# Altium PCB Electrode_Array_Hex.PcbDoc
Units mm, origin at the board's own origin, x right, y up, seen from the top; angles counter-clockwise.
Board outline 45 x 55 mm, 2 copper layers (Top Layer, Bottom Layer); 2 components, 38 nets, 95 pads, 48 vias.
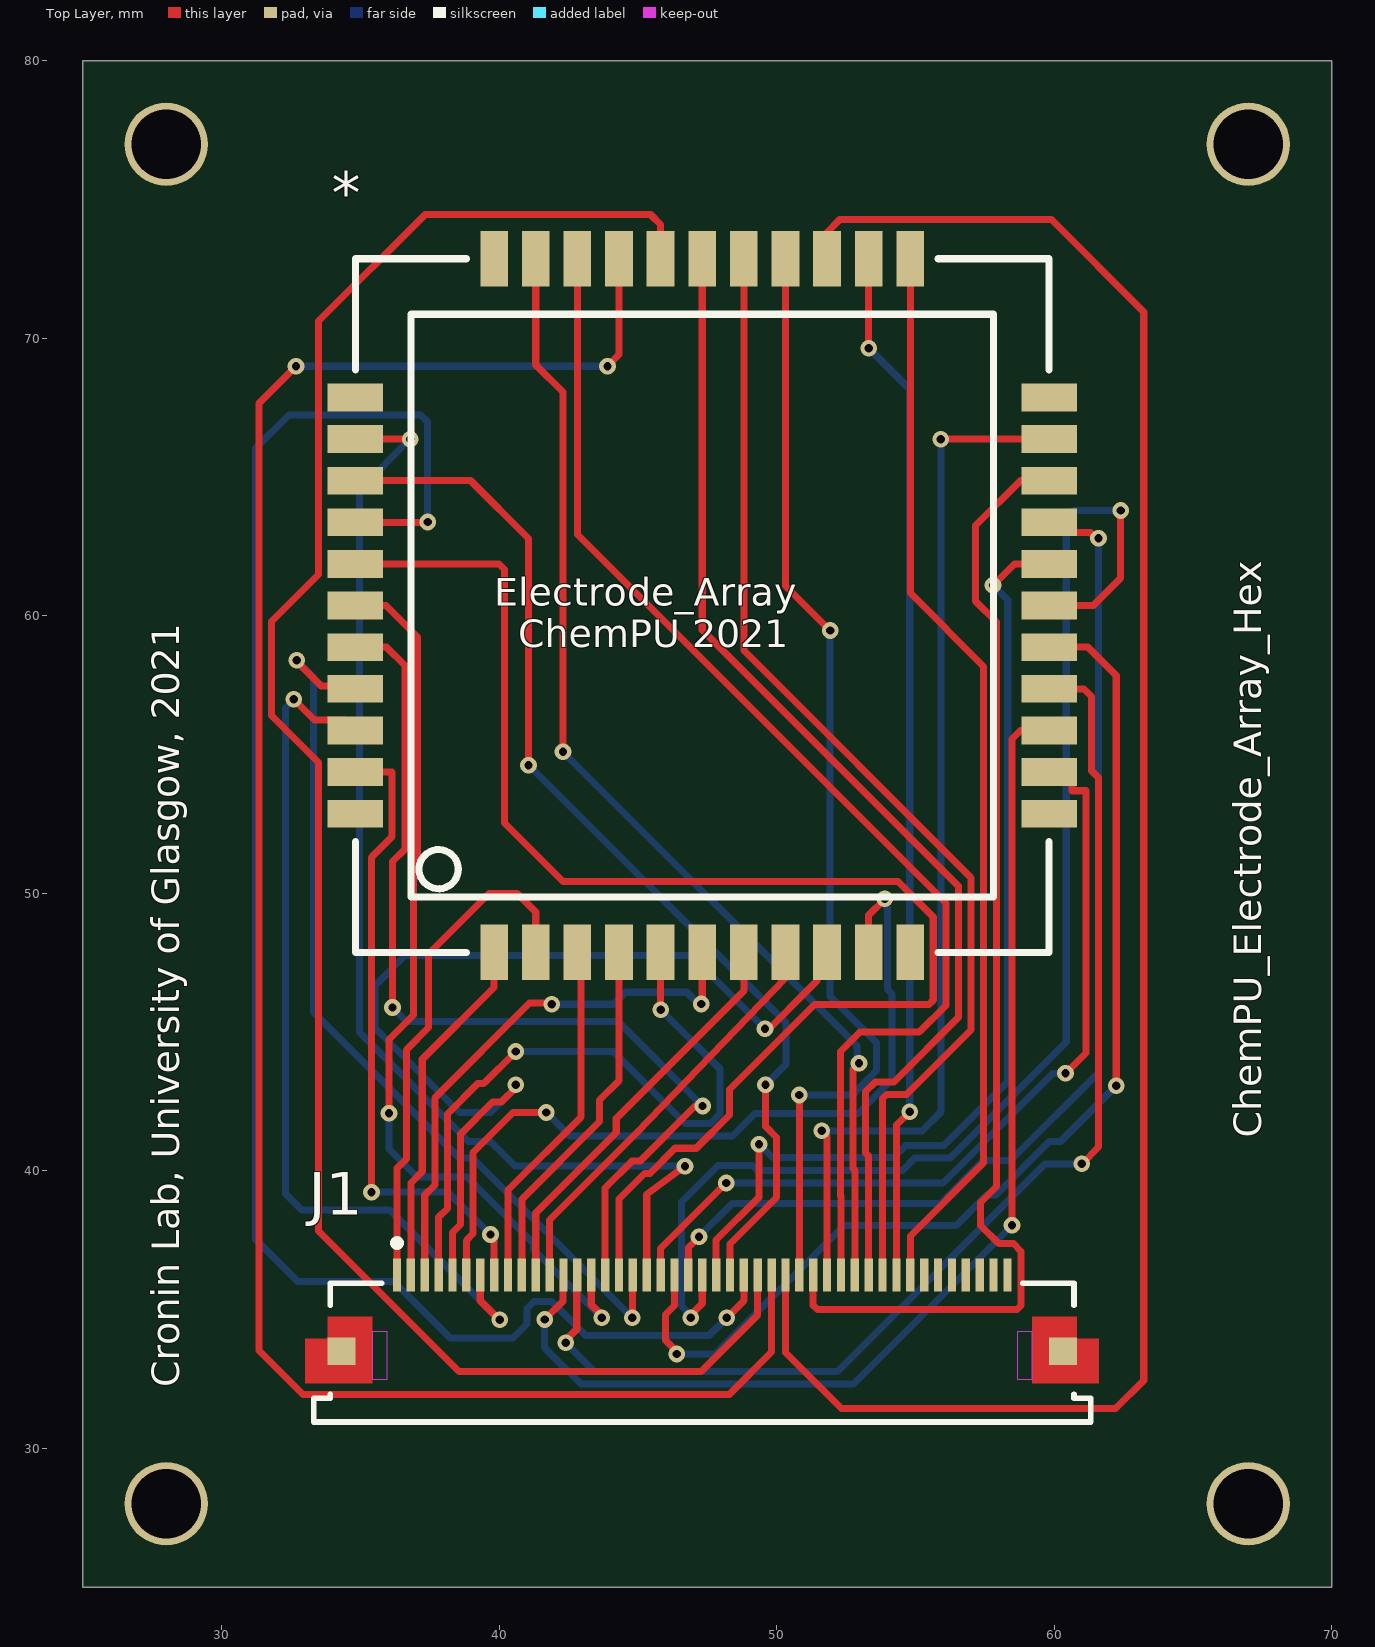
[diagram p0: Top Layer view]
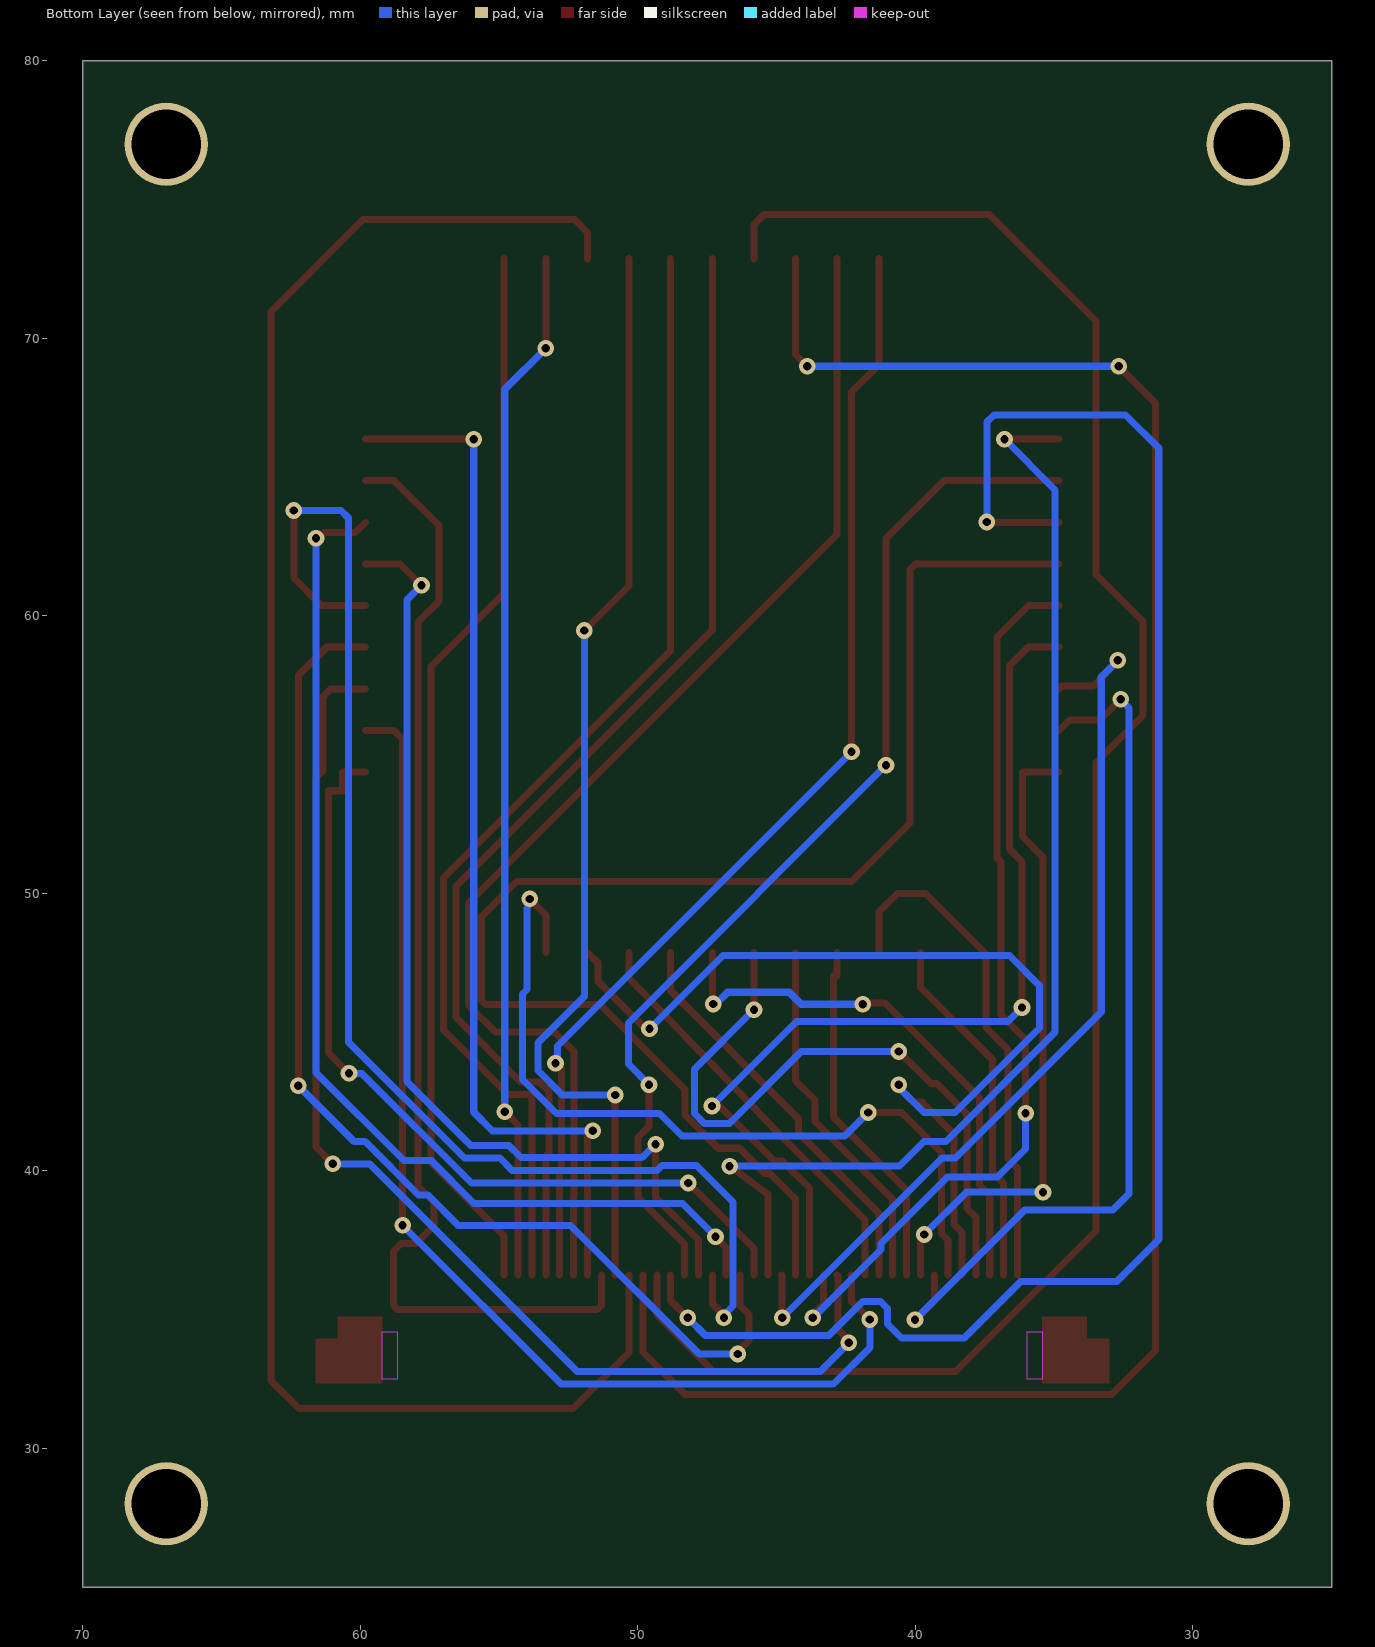
[diagram p1: Bottom Layer view, seen from below]

## Layer stack, top to bottom
Top Solder: solder mask 0.0102, Solder Resist, Dk 3.5
Top Layer: signal copper 0.0356
Dielectric 1: dielectric 0.32, FR-4, Dk 4.8
Bottom Layer: signal copper 0.0356
Bottom Solder: solder mask 0.0102, Solder Resist, Dk 3.5

## Board outline
25,25 70,25 70,80 25,80

## Design rules (kind name [scope] priority, off if disabled: settings)
Clearance [All] p1: gap=0.2 ignorepadtopadclearanceinfootprint=FALSE
PolygonConnect [All] p1: connectstyle=Relief reliefconductorwidth=0.254 reliefentries=4 polygonreliefangle="90 Angle" airgapwidth=0.254
RoutingVias [All] p1: holewidth=0.3 width=0.6 viastyle="Through Hole" minholewidth=0.3 minwidth=0.6 maxholewidth=0.3 maxwidth=0.6
SMDNeckDown [All] p1: percent=100.000
SolderMaskExpansion [All] p1: expansion=0.102 istentingtop=FALSE
Width [All] p1: maxlimit=0.254 minlimit=0.254 preferedwidth=0.254
30 further rules are at their usual default settings.

## Components (designator, comment, footprint, x,y, rotation, side; value= is the part's Value field where it differs from the comment)
* "Electrode_Array_ChemPU" PCBComponent_1 1177.818,1225.872 r0 top
J1 "54132-4562" MOLX-54132-4562 47.318,34.872 r0 top

## Footprints (in the part's own frame and the unit in brackets; to place one, negate y for a bottom-side part, rotate by r counter-clockwise, add the part's x,y. Pads: shape width x height; smd on the part's side, far side on the other; paste and mask are expansions set on the pad)
MOLX-54132-4562 [mm] "FPC Connector, 45-Leads, Right Angle, Pitch 0.5 mm, Mated Height 2.0 mm, SMT"
  rect 0.3x1.2 smd: 1(-11,1.375) 2(-10.5,1.375) 3(-10,1.375) 4(-9.5,1.375) 5(-9,1.375) 6(-8.5,1.375) 7(-8,1.375) 8(-7.5,1.375) 9(-7,1.375) 10(-6.5,1.375) 11(-6,1.375) 12(-5.5,1.375) 13(-5,1.375) 14(-4.5,1.375) 15(-4,1.375) 16(-3.5,1.375) 17(-3,1.375) 18(-2.5,1.375) 19(-2,1.375) 20(-1.5,1.375) 21(-1,1.375) 22(-0.5,1.375) 23(0,1.375) 24(0.5,1.375) 25(1,1.375) 26(1.5,1.375) 27(2,1.375) 28(2.5,1.375) 29(3,1.375) 30(3.5,1.375) 31(4,1.375) 32(4.5,1.375) 33(5,1.375) 34(5.5,1.375) 35(6,1.375) 36(6.5,1.375) 37(7,1.375) 38(7.5,1.375) 39(8,1.375) 40(8.5,1.375) 41(9,1.375) 42(9.5,1.375) 43(10,1.375) 44(10.5,1.375) 45(11,1.375)
  rect 1x1 smd: MP1(-13,-1.375) MP2(13,-1.375)
  Top Layer region: 11.9,-0.125 13.5,-0.125 13.5,-0.925 14.3,-0.925 14.3,-2.525 11.9,-2.525
  Top Layer region: -11.9,-0.125 -13.5,-0.125 -13.5,-0.925 -14.3,-0.925 -14.3,-2.525 -11.9,-2.525
  Keep-Out Layer region: 11.9,-0.675 11.35,-0.675 11.35,-2.375 11.9,-2.375
  Keep-Out Layer region: -11.9,-2.375 -11.35,-2.375 -11.35,-0.675 -11.9,-0.675
  silkscreen extent -14,-3.92 14,2.65, body extent -14,-3.92 14,1.68, height 2.01
PCBComponent_1 [mm]
  rect 2x1 smd: NC1(-1143,-1158) NC2(-1143,-1173) NC4(-1118,-1173) NC5(-1118,-1158) RE4(-1143,-1171.5) RE7(-1118,-1168.5) RE8(-1143,-1167) RE9(-1143,-1168.5) RE10(-1118,-1171.5) RE11(-1118,-1162.5) RE12(-1118,-1164) RE13(-1143,-1162.5) RE16(-1118,-1159.5) WE4(-1143,-1170) WE7(-1118,-1170) WE8(-1143,-1165.5) WE9(-1143,-1164) WE10(-1143,-1159.5) WE11(-1118,-1167) WE12(-1118,-1165.5) WE13(-1143,-1161) WE16(-1118,-1161)
  rect 1x2 smd: NC3(-1123,-1178) NC6(-1138,-1153) RE1(-1138,-1178) RE2(-1132,-1178) RE3(-1124.5,-1178) RE5(-1133.5,-1178) RE6(-1127.5,-1178) RE14(-1133.5,-1153) RE15(-1127.5,-1153) RE17(-1136.5,-1153) RE18(-1129,-1153) RE19(-1123,-1153) WE1(-1136.5,-1178) WE2(-1130.5,-1178) WE3(-1126,-1178) WE5(-1135,-1178) WE6(-1129,-1178) WE14(-1132,-1153) WE15(-1126,-1153) WE17(-1135,-1153) WE18(-1130.5,-1153) WE19(-1124.5,-1153)
  silkscreen extent -1143,-1178 -1118,-1153, body extent -1141,-1176 -1120,-1155, height 2

## Part data
*: library part Component_1
J1: library part CMP-1241-00535-1, "0.5 mm Pitch Easy-On(TM) Type FPC Connector, 2.0 mm Mated Height, Right Angle, ZIF, SMT, Bottom Contact, 45 Circuits, -20 to 85 degC, ELV and RoHS Compliant, Tape and Reel", Current (Max per Contact)=0.5A, Manufacturer=Molex, Voltage (Max)=50V, Circuits (Loaded)=45, ComponentLink1Description="Manufacturer URL", ComponentLink1URL=http://www.molex.com/molex/index.jsp, ComponentLink2Description=Datasheet, ComponentLink2URL=http://www.molex.com/webdocs/datasheets/pdf/en-us/0541324562_FFC_FPC_CONNECTORS.pdf, ComponentLink3Description="Package Specification", ComponentLink3URL=http://www.molex.com/pdm_docs/sd/541324562_sd.pdf, Contact Position=Bottom, Durability (mating cycles max)=20, Entry Angle="90degrees Angle", Mated Height=2.00mm, Material - Metal="Phosphor Bronze", Material - Plating Mating=Gold, Material - Plating Termination=Gold, Mounting Technology="Surface Mount", Number of Rows=1, Orientation="Right Angle", PackageDescription="45-Lead FPC Connector, Pitch 0.5 mm", PackageReference=54132-4562, PackageVersion="Rev. F, 07/2010", Packing="Tape and Reel", PartNumber=54132-4562, PCB Locator=No, PCB Retention=Yes, Pitch - Mating Interface=0.50mm, Polarized to PCB=Yes, RoHS=TRUE, Stackable=No

## Free pads (board coordinates)
  round 3 hole 2.5: H1(28,77) H2(67,77) H3(67,28) H4(28,28)

## Via types
v1: diameter 0.6, hole 0.3, Top Layer to Bottom Layer, 48 vias

## Nets (pads, with @x,y where several pads share a name; then routed paths per layer and width w, separated by ;. In a path a pad name is that pad's centre, name@x,y a point inside that pad or via, vN(x,y) a via of type N, cw(c..) or ccw(c..) an arc to the next point about the centre after c; other vN are vias at no path point)
RE1: *.RE1 J1.2 | length 12.9
  Top Layer w0.254: J1.2 36.818,39.568 37.228,39.978 37.228,44.022 39.818,46.612 *.RE1
RE2: *.RE2 J1.4 | length 24.6
  Top Layer w0.254: J1.4 37.818,38.327 38.136,38.645 38.136,42.052 39.227,43.143 39.443,43.143 v1(40.6,44.3) ; v1(45.818,45.808) *.RE2
  Bottom Layer w0.254: v1(40.6,44.3) 44.113,44.3 46.704,41.709 47.61,41.709 47.966,42.065 47.966,43.661 v1(45.818,45.808)
RE3: *.RE3 J1.6 | length 30.2
  Top Layer w0.254: J1.6 38.818,37.496 39.057,37.735 39.057,40.659 40.498,42.1 v1(41.7,42.1) ; *.RE3 53.318,49.218 v1(53.9,49.8)
  Bottom Layer w0.254: v1(41.7,42.1) 42.545,41.255 48.407,41.255 49.22,42.068 52.939,42.068 54.163,43.292 54.163,46.368 54,46.531 54,49.478 53.966,49.512 53.966,49.734 v1(53.9,49.8)
RE4: *.RE4 J1.8 | length 23.2
  Top Layer w0.254: *.RE4 36.145,54.372 36.145,52.045 35.401,51.301 v1(35.401,39.23) ; v1(39.685,37.706) 39.818,37.573 J1.8
  Bottom Layer w0.254: v1(35.401,39.23) 38.161,39.23 v1(39.685,37.706)
RE5: *.RE5 J1.10 | length 13.1
  Top Layer w0.254: J1.10 40.818,38.976 43.619,41.777 43.619,42.55 44.318,43.249 *.RE5
RE6: *.RE6 J1.12 | length 15.1
  Top Layer w0.254: J1.12 41.818,38.23 44.963,41.375 50.318,46.947 *.RE6
RE7: *.RE7 J1.14 | length 43.6
  Top Layer w0.254: v1(42.4,33.8) 42.4,33.894 42.795,34.289 42.795,35.654 42.795,36.224 J1.14 ; *.RE7 61.072,57.372 61.352,57.093 61.352,54.419 61.606,54.165 61.606,40.856 v1(61,40.25)
  Bottom Layer w0.254: v1(42.4,33.8) 43.427,32.773 52.188,32.773 59.665,40.25 v1(61,40.25)
RE8: *.RE8 J1.16 | length 35.1
  Top Layer w0.254: *.RE8 35.936,58.872 36.599,58.209 36.599,51.591 36.155,51.147 v1(36.155,45.885) ; J1.16 43.818,39.379 44.796,40.357 45.085,40.357 47.064,42.336 v1(47.331,42.336)
  Bottom Layer w0.254: v1(36.155,45.885) 36.663,45.377 44.29,45.377 v1(47.331,42.336)
RE9: *.RE9 J1.18 | length 33.1
  Top Layer w0.254: v1(32.7,58.4) 32.7,58.366 33.586,57.48 34.71,57.48 *.RE9 ; v1(44.8,34.7) 44.809,34.709 44.809,36.238 J1.18
  Bottom Layer w0.254: v1(32.7,58.4) 33.3,57.8 33.3,45.724 38.56,40.464 39.036,40.464 v1(44.8,34.7)
RE10: *.RE10 J1.20 | length 30.6
  Top Layer w0.254: J1.20 45.818,37.198 v1(48.18,39.56) ; *.RE10 60.64,54.372 60.64,53.699 61.145,53.699 61.145,44.247 v1(60.412,43.514)
  Bottom Layer w0.254: v1(48.18,39.56) 55.998,39.56 59.952,43.514 v1(60.412,43.514)
RE11: *.RE11 J1.22 | length 39.7
  Top Layer w0.254: J1.22 46.818,37.242 v1(47.204,37.628) ; *.RE11 60.191,62.999 61.307,62.999 61.506,62.8 v1(61.6,62.8)
  Bottom Layer w0.254: v1(47.204,37.628) 48.399,38.823 55.903,38.823 57.447,40.367 58.431,40.367 61.6,43.536 v1(61.6,62.8)
RE12: *.RE12 J1.24 | length 36.1
  Top Layer w0.254: J1.24 47.818,37.503 49.363,39.047 v1(49.363,40.957) ; v1(57.8,61.1) 58.572,61.872 *.RE12
  Bottom Layer w0.254: v1(49.363,40.957) 49.845,40.474 54.214,40.474 54.653,40.914 56.025,40.914 58.329,43.218 58.329,60.571 v1(57.8,61.1)
RE13: *.RE13 J1.26 | length 63.4
  Top Layer w0.254: *.RE13 37.412,63.372 v1(37.425,63.385) ; v1(48.2,34.7) 48.818,35.318 J1.26
  Bottom Layer w0.254: v1(37.425,63.385) 37.425,66.992 37.171,67.246 32.421,67.246 31.227,66.052 31.227,37.528 32.751,36.004 36.206,36.004 38.238,33.972 40.498,33.972 41.006,34.48 41.006,35.039 41.26,35.293 41.895,35.293 43.115,34.073 47.573,34.073 v1(48.2,34.7)
RE14: *.RE14 J1.28 | length 73.8
  Top Layer w0.254: v1(32.675,68.999) 31.34,67.664 31.34,33.529 32.929,31.94 48.294,31.94 49.818,33.464 J1.28 ; v1(43.902,68.999) 44.318,69.415 *.RE14
  Bottom Layer w0.254: v1(32.675,68.999) v1(43.902,68.999)
RE15: *.RE15 J1.30 | length 40.3
  Top Layer w0.254: *.RE15 50.318,61.084 v1(51.928,59.474) ; J1.30 v1(50.818,42.735)
  Bottom Layer w0.254: v1(50.818,42.735) 52.727,42.735 53.605,43.613 53.605,44.615 51.928,46.291 v1(51.928,59.474)
RE16: *.RE16 J1.32 | length 38
  Top Layer w0.254: v1(51.623,41.441) 51.818,41.246 J1.32 ; v1(55.916,66.372) *.RE16
  Bottom Layer w0.254: v1(51.623,41.441) 55.244,41.441 55.916,42.113 v1(55.916,66.372)
RE17: *.RE17 J1.34 | length 41.6
  Top Layer w0.254: *.RE17 41.318,69.049 42.3,68.068 v1(42.3,55.1) ; J1.34 52.818,40.02 52.755,40.082 52.755,43.664 v1(52.97,43.878)
  Bottom Layer w0.254: v1(42.3,55.1) 52.903,44.497 52.903,43.944 v1(52.97,43.878)
RE18: *.RE18 J1.36 | length 41.8
  Top Layer w0.254: *.RE18 48.818,58.75 57.007,50.561 57.007,45.08 54.679,42.752 53.96,42.752 53.818,42.61 J1.36
RE19: *.RE19 J1.38 | length 38.8
  Top Layer w0.254: J1.38 54.818,37.647 57.461,40.29 57.461,58.177 54.818,60.82 *.RE19
WE1: *.WE1 J1.1 | length 18.5
  Top Layer w0.254: J1.1 36.318,40.095 36.655,40.432 36.655,44.362 37.456,45.164 37.456,47.821 39.635,50 40.65,50 41.318,49.332 *.WE1
WE2: *.WE2 J1.3 | length 19.8
  Top Layer w0.254: J1.3 37.318,39.123 37.682,39.487 37.682,42.633 41.092,46.043 41.86,46.043 v1(41.9,46.004) ; v1(47.28,46.012) 47.318,46.05 *.WE2
  Bottom Layer w0.254: v1(41.9,46.004) 44.114,46.004 44.546,46.435 46.763,46.435 47.186,46.012 v1(47.28,46.012)
WE3: *.WE3 J1.5 | length 35.7
  Top Layer w0.254: J1.5 38.318,37.777 38.603,38.061 38.603,41.319 39.765,42.482 40.075,42.482 40.6,43.006 v1(40.6,43.1) ; v1(49.582,45.118) 49.718,45.118 51.145,46.545 51.445,46.845 51.445,47.499 *.WE3
  Bottom Layer w0.254: v1(40.6,43.1) 40.6,43.006 39.694,42.1 38.568,42.1 35.52,45.148 35.52,46.672 36.612,47.764 46.936,47.764 v1(49.582,45.118)
WE4: *.WE4 J1.7 | length 32.1
  Top Layer w0.254: v1(32.6,57) 32.6,56.994 33.349,56.245 34.445,56.245 *.WE4 ; J1.7 39.318,35.318 40.004,34.632 v1(40.016,34.632)
  Bottom Layer w0.254: v1(32.6,57) 32.6,56.978 32.3,56.678 32.3,39.173 32.878,38.595 36.053,38.595 v1(40.016,34.632)
WE5: *.WE5 J1.9 | length 12.8
  Top Layer w0.254: J1.9 40.318,39.306 42.945,41.933 42.945,47.021 42.818,47.021 *.WE5
WE6: *.WE6 J1.11 | length 14.7
  Top Layer w0.254: J1.11 41.318,38.486 44.22,41.387 44.22,41.892 48.818,46.491 *.WE6
WE7: *.WE7 J1.13 | length 41.6
  Top Layer w0.254: v1(41.64,34.642) 42.295,35.297 42.295,36.224 J1.13 ; v1(58.481,38.036) 58.481,55.567 58.786,55.872 *.WE7
  Bottom Layer w0.254: v1(41.64,34.642) 41.64,33.626 42.947,32.319 52.764,32.319 v1(58.481,38.036)
WE8: *.WE8 J1.15 | length 33.6
  Top Layer w0.254: *.WE8 35.926,60.372 37.053,59.245 37.053,51.283 36.907,51.137 36.907,45.618 36.028,44.738 v1(36.028,42.075) ; J1.15 43.318,35.175 43.7,34.794 v1(43.7,34.7)
  Bottom Layer w0.254: v1(36.028,42.075) 36.028,40.786 37.039,39.774 38.836,39.774 41.235,37.376 41.235,37.165 v1(43.7,34.7)
WE9: *.WE9 J1.17 | length 52
  Top Layer w0.254: *.WE9 39.99,61.872 40.193,61.669 40.193,52.539 42.306,50.427 54.371,50.427 55.645,49.152 55.645,46.149 55.496,46 51.361,46 48.296,42.935 48.296,42.008 47.102,40.814 46.34,40.814 45.429,39.903 45.242,39.903 44.318,38.979 J1.17
WE10: *.WE10 J1.19 | length 42.5
  Top Layer w0.254: *.WE10 v1(36.79,66.372) ; J1.19 45.318,39.154 v1(46.696,40.17)
  Bottom Layer w0.254: v1(36.79,66.372) 34.961,64.543 34.961,44.996 38.898,41.059 39.685,41.059 40.574,40.17 v1(46.696,40.17)
WE11: *.WE11 J1.21 | length 40.6
  Top Layer w0.254: J1.21 46.318,35.141 46,34.823 46,33.894 46.4,33.494 v1(46.4,33.4) ; *.WE11 61.217,58.872 62.241,57.848 v1(62.241,43.065)
  Bottom Layer w0.254: v1(46.4,33.4) 47.787,33.4 52.423,38.036 56.475,38.036 57.567,39.128 57.901,39.128 59.837,41.064 60.239,41.064 v1(62.241,43.065)
WE12: *.WE12 J1.23 | length 48.8
  Top Layer w0.254: v1(46.9,34.7) 46.9,34.794 47.318,35.212 J1.23 ; *.WE12 61.412,60.372 62.4,61.36 v1(62.4,63.8)
  Bottom Layer w0.254: v1(46.9,34.7) 46.9,34.794 46.569,35.125 46.569,38.874 47.89,40.195 49.134,40.195 49.315,40.014 54.53,40.014 54.976,40.46 56.255,40.46 60.437,44.641 60.437,63.538 60.7,63.8 v1(62.4,63.8)
WE13: *.WE13 J1.25 | length 38.7
  Top Layer w0.254: *.WE13 38.974,64.872 41.057,62.789 v1(41.057,54.622) ; J1.25 48.318,37.361 50,39.042 50,41.207 49.6,41.607 v1(49.6,43.1)
  Bottom Layer w0.254: v1(41.057,54.622) 50.345,45.334 50.345,43.845 v1(49.6,43.1)
WE14: *.WE14 J1.27 | length 69.7
  Top Layer w0.254: *.WE14 45.818,74.104 45.463,74.46 37.323,74.46 33.488,70.624 33.488,61.488 31.794,59.794 31.794,56.406 33.488,54.712 33.488,37.833 38.548,32.773 47.281,32.773 49.318,34.81 J1.27
WE15: *.WE15 J1.29 | length 69.4
  Top Layer w0.254: J1.29 50.318,33.448 52.335,31.432 62.215,31.432 63.231,32.448 63.231,70.959 59.908,74.282 52.275,74.282 51.818,73.825 *.WE15
WE16: *.WE16 J1.31 | length 41.6
  Top Layer w0.254: J1.31 51.318,35.149 51.467,35 58.663,35 58.812,35.149 58.812,37.096 58.532,37.376 58.007,37.376 57.346,38.036 57.346,38.857 57.923,39.433 57.923,59.78 57.173,60.53 57.173,63.259 58.786,64.872 *.WE16
WE17: *.WE17 J1.33 | length 45
  Top Layer w0.254: *.WE17 42.818,62.934 56.099,49.653 56.099,45.961 55.139,45 53,45 52.301,44.301 52.301,39.1 52.318,39.083 J1.33
WE18: *.WE18 J1.35 | length 42.3
  Top Layer w0.254: *.WE18 47.318,59.492 56.553,50.257 56.553,45.534 54.225,43.206 53.554,43.206 53.209,42.862 53.209,40.645 53.318,40.536 J1.35
WE19: *.WE19 J1.37 | length 37.4
  Top Layer w0.254: v1(53.318,69.648) *.WE19 ; J1.37 54.318,41.645 v1(54.798,42.125)
  Bottom Layer w0.254: v1(53.318,69.648) 54.798,68.167 v1(54.798,42.125)
pads on no net: *.NC1 *.NC2 *.NC3 *.NC4 *.NC5 *.NC6 J1.39 J1.40 J1.41 J1.42 J1.43 J1.44 J1.45 J1.MP1 J1.MP2

## Silkscreen, mask and mechanical layers (free items; w line width, h text height)
Top Overlay:
  text "ChemPU_Electrode_Array_Hex" at 67.467,41.2 h1 r90
  text "Cronin Lab, University of Glasgow, 2021" at 28.467,32.2 h1 r90

## Dimensions
25,80 to 25,25 on Mechanical 5
25,80 to 70,80 on Mechanical 5

## Text inside footprints (layer, text, board x,y; h text height)
*: Top Overlay "Electrode_Array /   ChemPU 2021" at 39.818,58.872 h1